# Altium PCB Wacky_Racer_PCB.PcbDoc (part 1 of 2)
Units mil, origin at the board's own origin, x right, y up, seen from the top; angles counter-clockwise.
Board outline 2519.68 x 3346.46 mil, 4 copper layers (Top Side, Ground Plane, Power Plane, Bottom Side), stack 33.234 mil thick; 87 components, 64 nets, 291 pads, 75 vias.
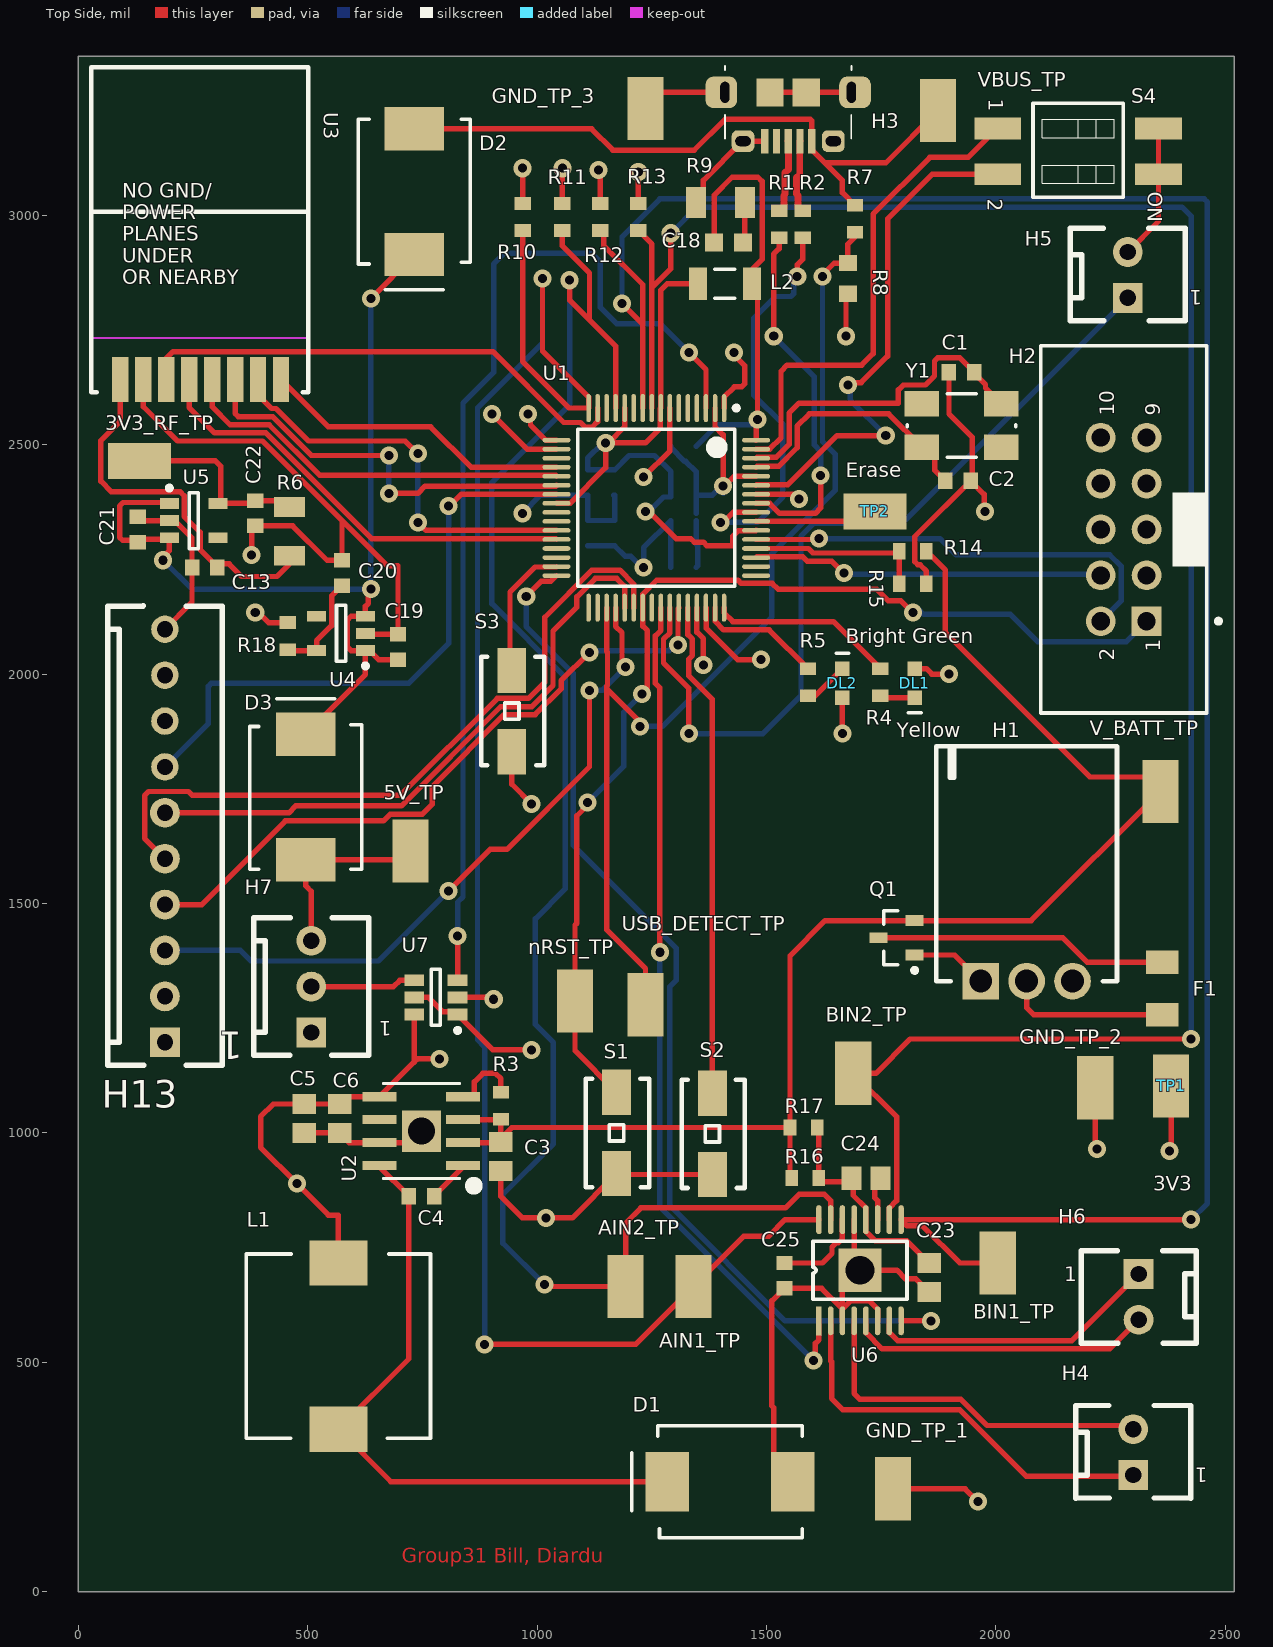
[diagram p0: Top Side view]
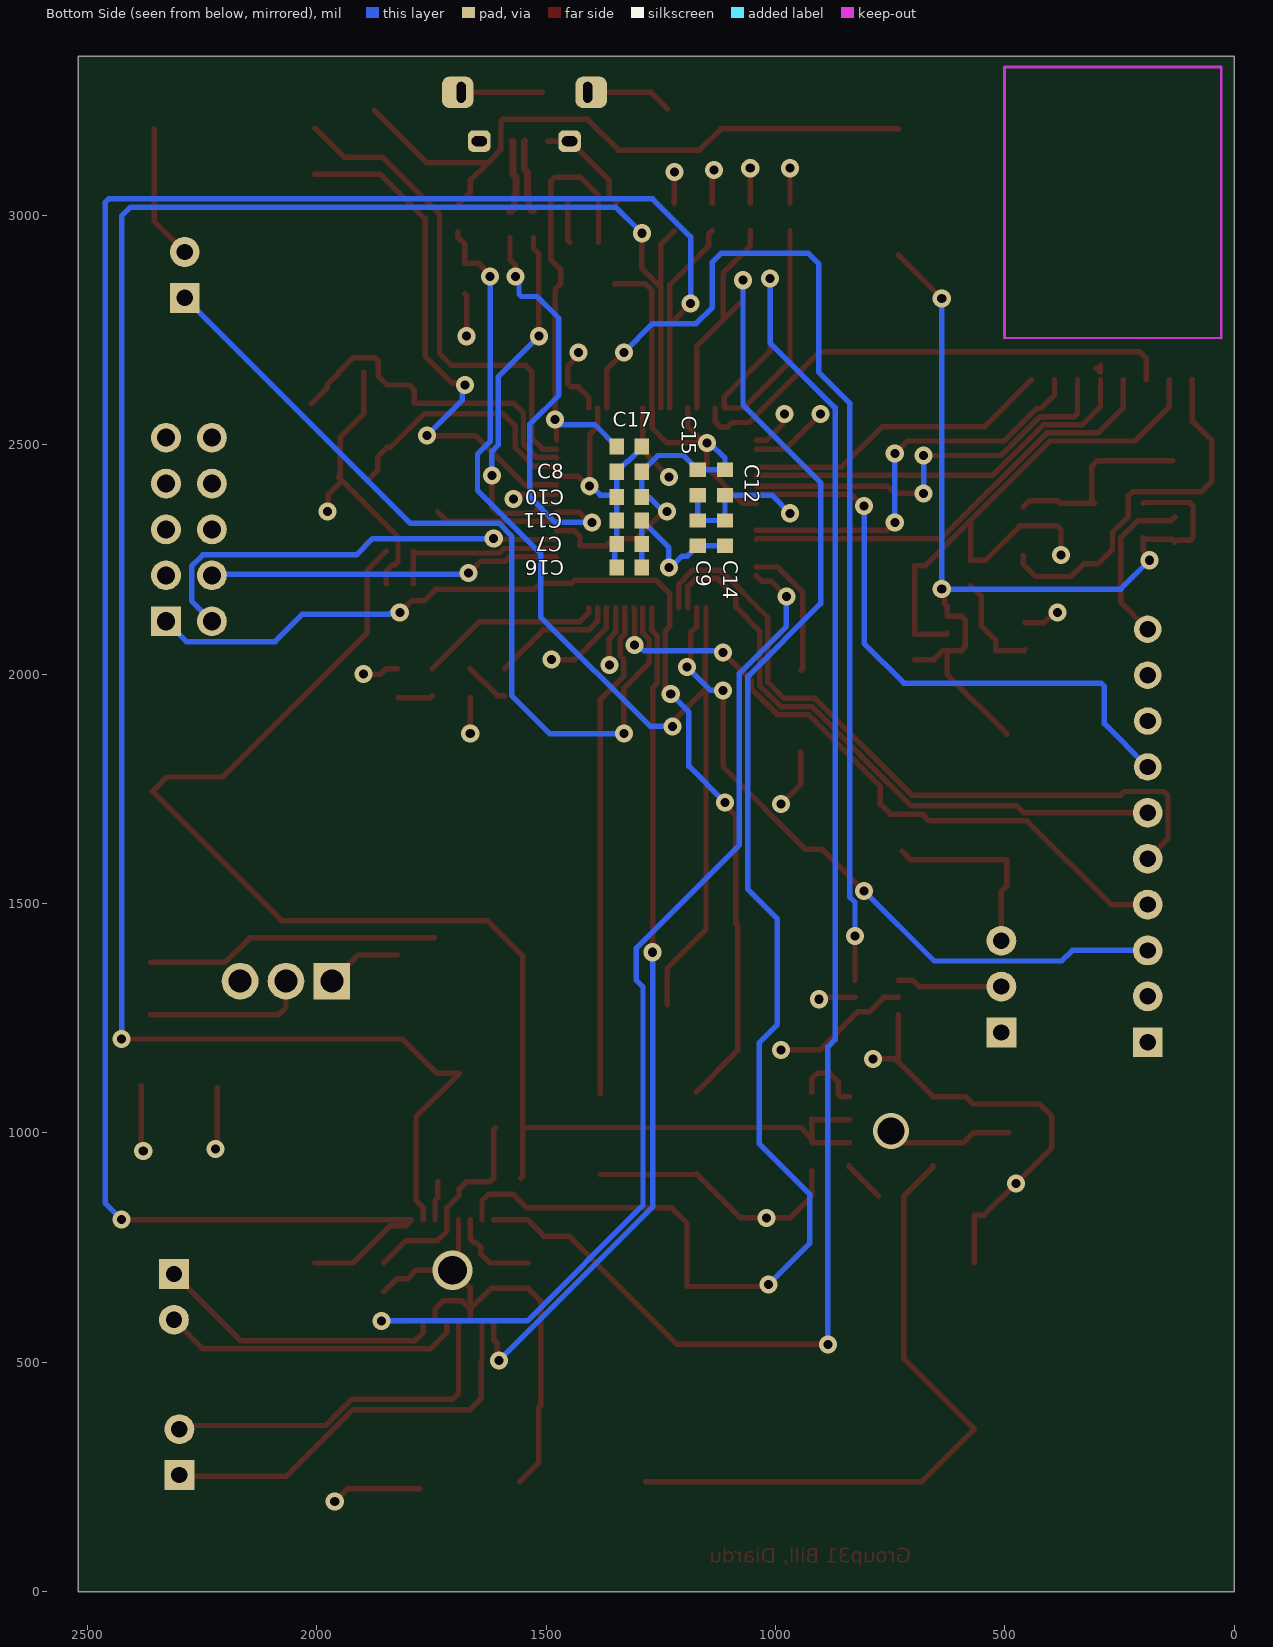
[diagram p1: Bottom Side view, seen from below]
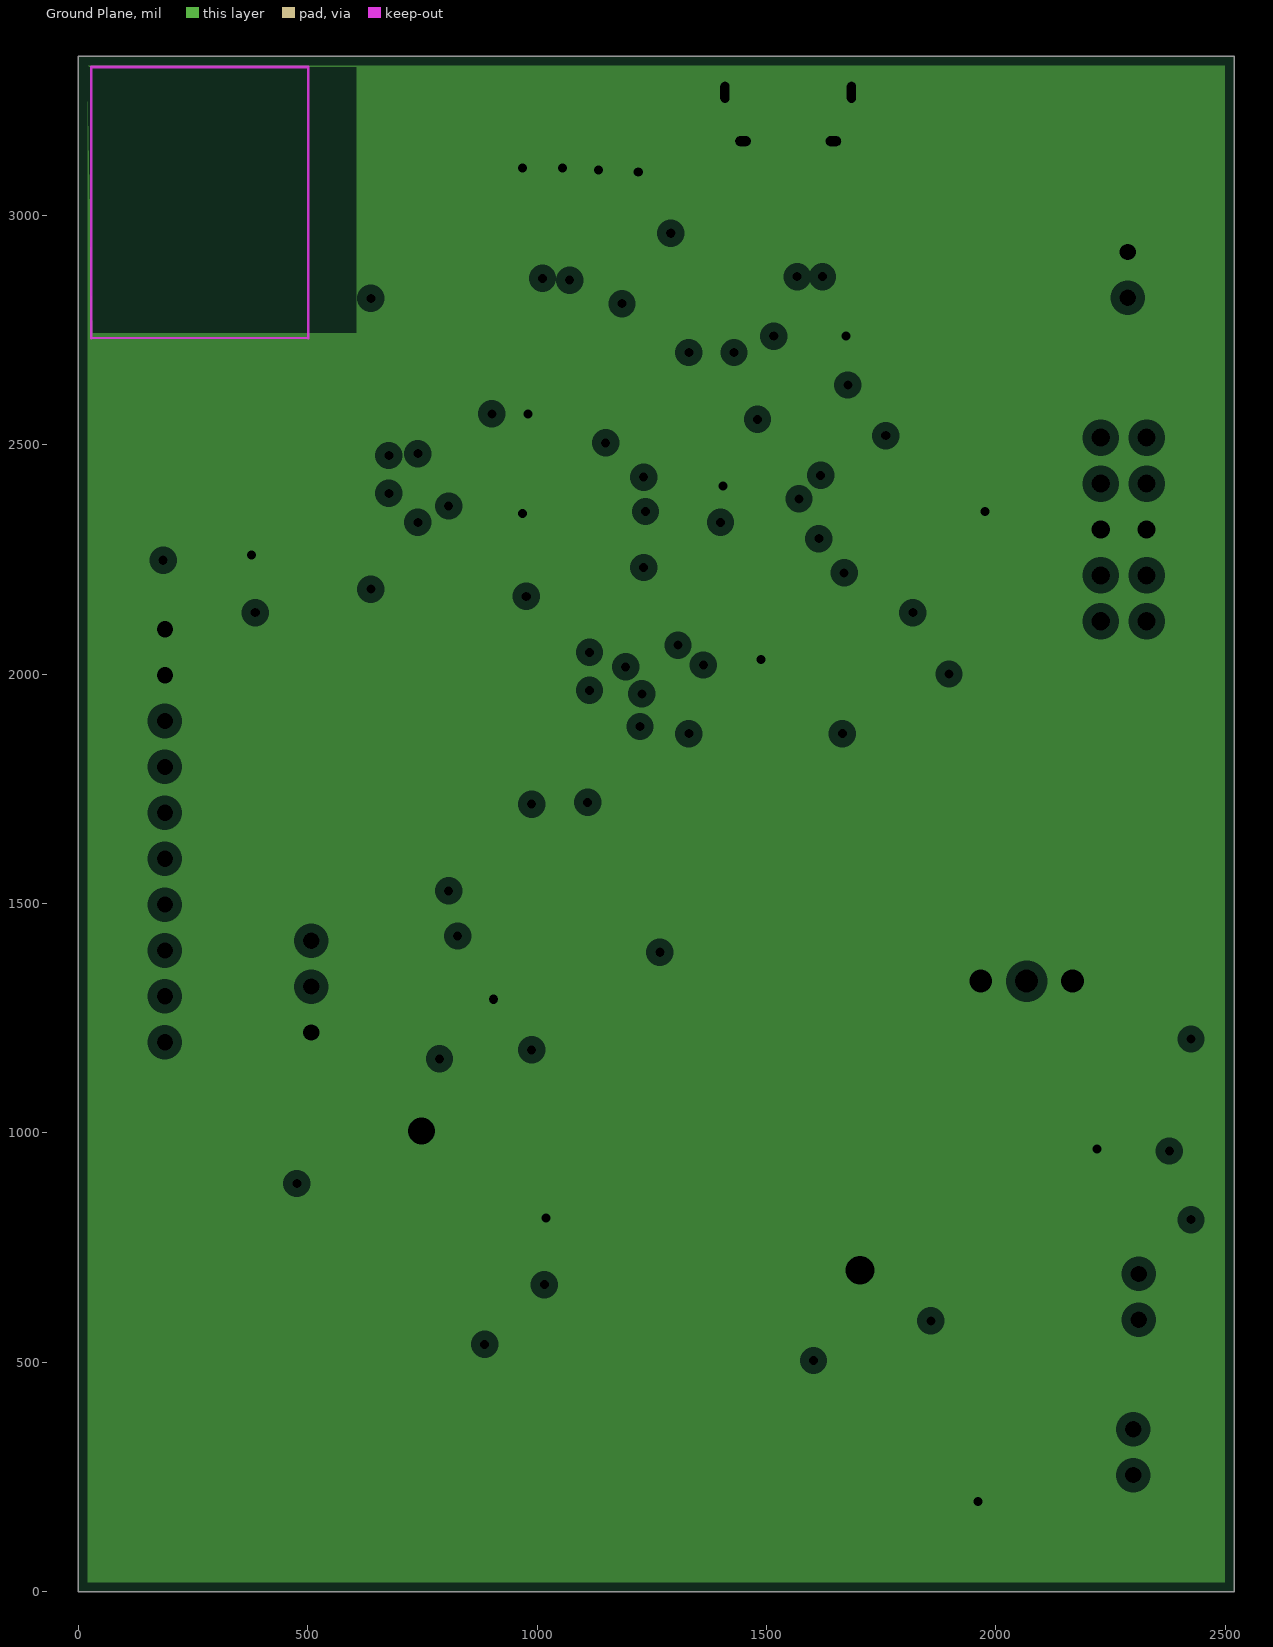
[diagram p2: Ground Plane, clearances drawn from the general rule]
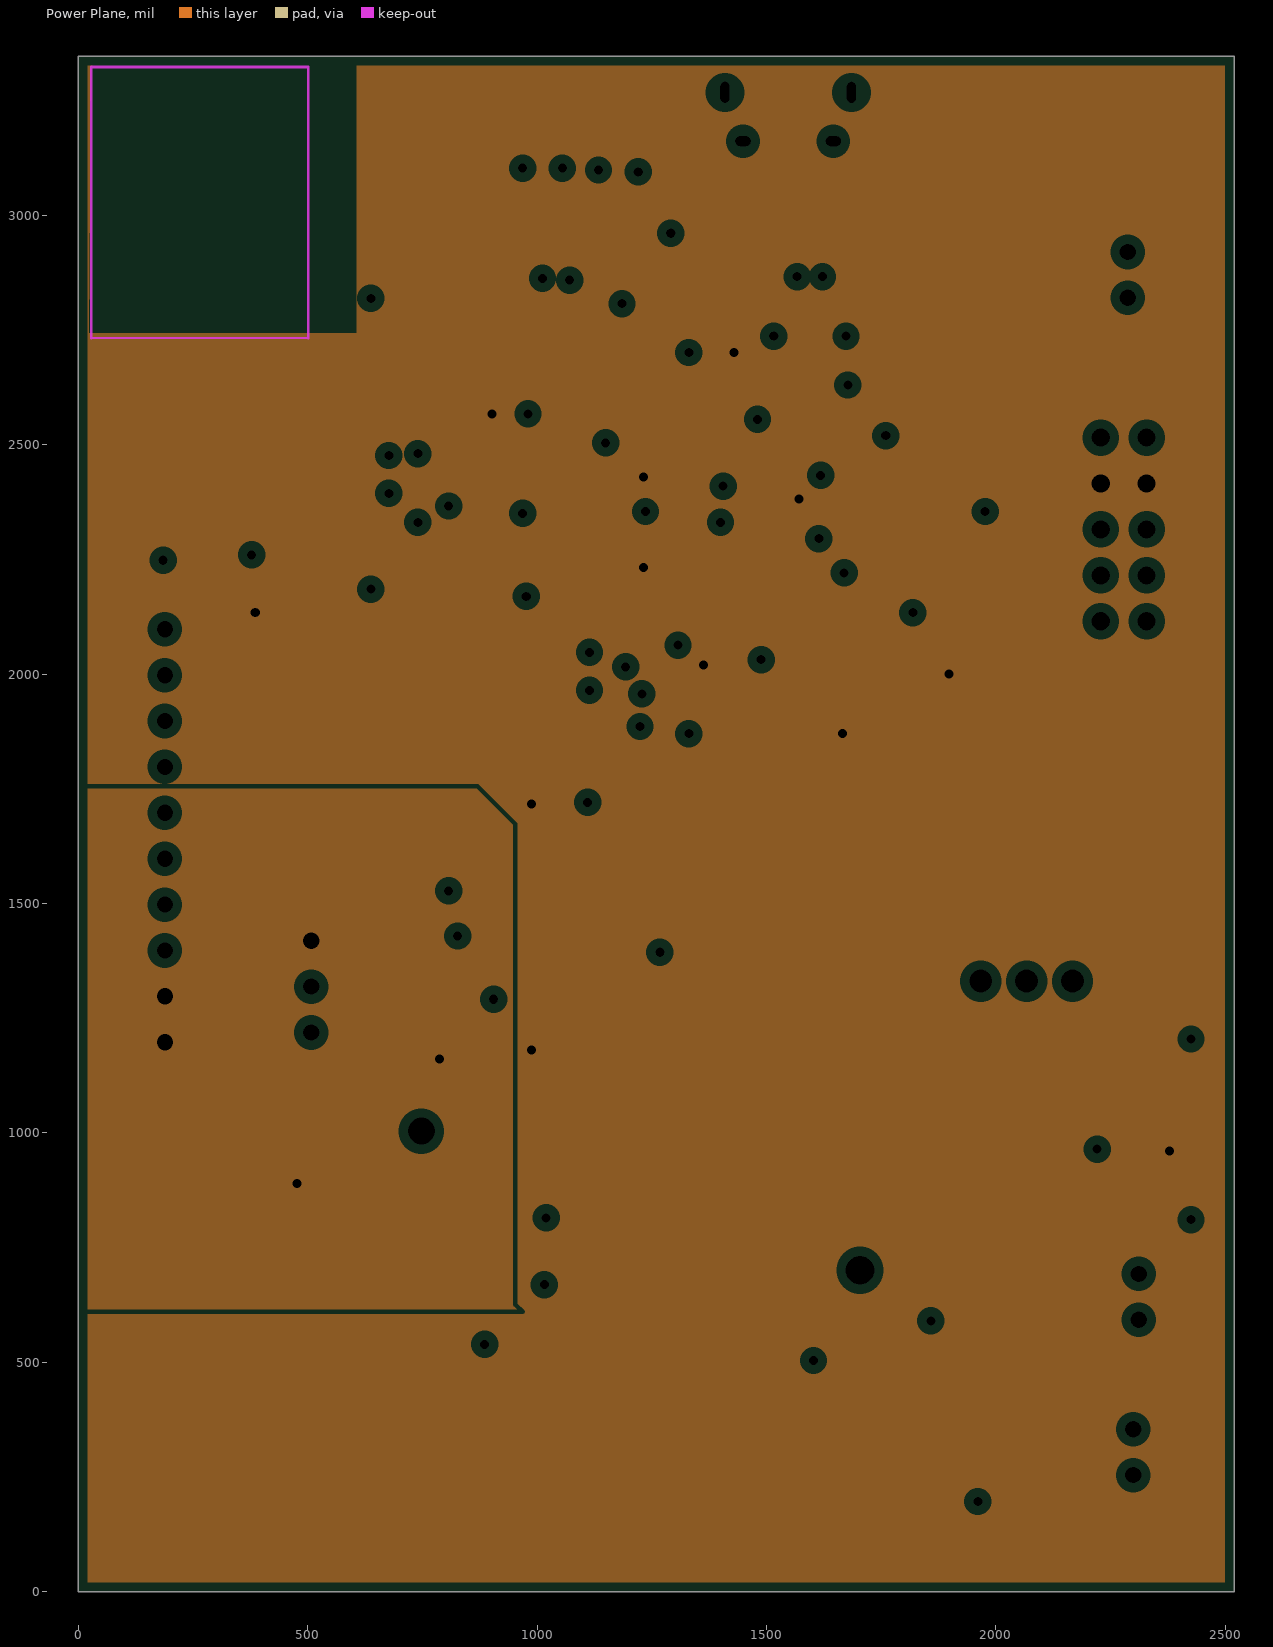
[diagram p3: Power Plane, clearances drawn from the general rule]

## Layer stack, top to bottom
Top Solder: solder mask 0.4, Solder Resist, Dk 3.5
Top Side: signal copper 1.4
Dielectric 1: core 12.6, FR-4, Dk 4.8
Ground Plane: plane copper 1.4169, net GND
Dielectric 3: prepreg 5, Dk 4.2
Power Plane: plane copper 1.4169, net (Multiple Nets)
Dielectric 4: core 10, Dk 4.2
Bottom Side: signal copper 1.4
Bottom Solder: solder mask 0.4, Solder Resist, Dk 3.5

## Board outline
0,3346.46 2519.68,3346.46 2519.68,0 0,0 0,3346.46

## Design rules (kind name [scope] priority, off if disabled: settings)
BoardOutlineClearance [All] p1: gap=19.68 ignorepadtopadclearanceinfootprint=FALSE
Clearance Min_Clearance_Circuit_Labs [All] p1: gap=5.91 ignorepadtopadclearanceinfootprint=FALSE except(0: Arc-Hole Track-Hole SMDPad-Hole THPad-Hole Via-Hole Fill-Hole Poly-Hole Region-Hole Text-Hole)
DiffPairsRouting [All] p1: maxlimit=10 minlimit=10 mostfreqgap=10 toplayer_minwidth=15 toplayer_maxwidth=15 toplayer_prefwidth=15 bottomlayer_minwidth=15 bottomlayer_maxwidth=15 bottomlayer_prefwidth=15 maxuncoupledlength=500
FanoutControl Fanout_BGA [IsBGA] p1 off: bgadir=Out bgaviamode=Centered fanoutstyle=Auto fanoutdirection=Alternating viagrid=1 // Fanout_BGA (Default Rule)
HoleSize [All] p1: absolutevalues=TRUE maxlimit=393.7 minlimit=11.81 maxpercent=80.000 minpercent=20.000
MinimumAnnularRing [All] p1: minimumring=3.94
MinimumSolderMaskSliver [All] p1: minsoldermaskwidth=3.94
NetAntennae [All] p1: netantennaetolerance=39.37
PasteMaskExpansion [All] p1 off: expansion=7.87
PlaneClearance [All] p1: clearance=20
PlaneConnect [All] p1: planeconnectstyle=Relief reliefexpansion=20 reliefentries=4 reliefconductorwidth=10 reliefairgap=10
PolygonConnect [All] p1: connectstyle=Relief reliefconductorwidth=10 reliefentries=4 polygonreliefangle="90 Angle" airgapwidth=10
RoutingVias [All] p1: holewidth=19.68 width=39.37 viastyle="Through Hole" minholewidth=11.81 minwidth=23.62 maxholewidth=39.37 maxwidth=78.74
SMDNeckDown [All] p1 off: percent=50.000
SMDToCorner [All] p1: distance=98425
SMDToPlane [All] p1: distance=1968504
SilkToSolderMaskClearance SilkscreenOverComponentPads [IsPad] p1: minsilkscreentomaskgap=10 clearancetoexposedcopper=TRUE
SolderMaskExpansion [All] p1: expansion=4
ViasUnderSMD [All] p1: allowed=FALSE
Width [All] p1: maxlimit=78.74 minlimit=5.91 preferedwidth=11.81
21 further rules are at their usual default settings.

## Classes and differential pairs
differential pair D: +D_P -D_N

## Components (designator, comment, footprint, x,y, rotation, side; value= is the part's Value field where it differs from the comment)
3V3_RF_TP "TP" TP_1206 133.86,2464.57 r180 top
5V_TP "TP" TP_1206 724.41,1614.17 r90 top
AIN1_TP "TP" TP_1206 1340.72,665.35 r270 top
AIN2_TP "TP" TP_1206 1192.91,665.35 r90 top
BIN1_TP "TP" TP_1206 2003.94,716.54 r90 top
BIN2_TP "TP" TP_1206 1688.98,1129.92 r90 top
C1 "27pF" CAPC1608L 1925.2,2657.48 r0 top
C2 "27pF" CAPC1608L 1917.32,2421.26 r180 top
C3 "10uF" CAPC2012L 921.26,948.82 r90 top
C4 "100nF" CAPC1608L 748.03,862.2 r180 top
C5 "33uF" CAPC2012L 492.13,1031.5 r90 top
C6 "33uF" CAPC2012L 569.56,1031.5 r90 top
C7 "100nF" CAPC1608L 1318.9,2283.46 r180 bottom
C8 "100nF" CAPC1608L 1318.9,2440.94 r0 bottom
C9 "100nF" CAPC1608L 1169.29,2307.09 r270 bottom
C10 "100nF" CAPC1608L 1318.9,2385.83 r0 bottom
C11 "100nF" CAPC1608L 1318.9,2334.65 r180 bottom
C12 "100nF" CAPC1608L 1110.24,2417.32 r270 bottom
C13 "10uF" CAPC1608L 275.59,2232.28 r0 top
C14 "100nF" CAPC1608L 1110.24,2307.09 r270 bottom
C15 "100nF" CAPC1608L 1169.29,2417.32 r270 bottom
C16 "100nF" CAPC1608L 1318.9,2232.28 r180 bottom
C17 "100nF" CAPC1608L 1318.9,2496.06 r0 bottom
C18 "4.7uF" CAPC1608N 1417.32,2940.94 r180 top
C19 "1uF" CAPC1608L 696.85,2059.06 r270 top
C20 "1uF" CAPC1608L 574.8,2220.47 r270 top
C21 "1uF" CAPC1608L 129.62,2314.79 r270 top
C22 "1uF" CAPC1608L 385.83,2350.39 r90 top
C23 "10uF" CAPC2012L 1854.33,685.04 r270 top
C24 "10uF" CAPC2012L 1716.54,901.57 r0 top
C25 "2.2uF" CAPC1608L 1539.37,688.98 r270 top
D1 "VS-30BQ015-M3/9AT" SMC 1420.28,240.16 r180 top
D2 "VS-30BQ015-M3/9AT" SMC 732.28,3051.18 r270 top
D3 "VS-30BQ015-M3/9AT" SMC 496.06,1732.28 r90 top
DL1 "Yellow" WL-SMCW0603 1822.83,1948.82 r90 top
DL2 "Bright Green" WL-SMCW0603 1665.35,2011.81 r270 top
F1 "5A" RESC3216N 2362.2,1314.96 r90 top
GND_TP_1 "TP" TP_1206 1775.59,224.41 r90 top
GND_TP_2 "TP" TP_1206 2216.54,1098.43 r90 top
GND_TP_3 "TP" TP_1206 1236.22,3232.28 r90 top
H1 "Battery_HEADER_3pin" BATT_HEADER_3POS 2066.93,1330.71 r0 top
H2 "Header 5X2 Vert" IDC2.54-V10D 2278.35,2315.13 r90 top
H3 "JS_USB_MICRO_B" FCI_USB_10118194-0001LF 1547.24,3324.8 r180 top
H4 "2 Pin Molex KK HDR" MOLEX_KK_2_HDR 2299.21,254.33 r90 top
H5 "2 Pin Molex KK HDR" MOLEX_KK_2_HDR 2287.4,2819.86 r90 top
H6 "2 Pin Molex KK HDR" MOLEX_KK_2_HDR 2311.02,692.78 r270 top
H7 "3 Pin Molex KK Hdr" MOLEX_KK_3_HDR 507.87,1218.9 r90 top
H13 "=Value" MOLEX_KK_10_HDR 188.98,1197.64 r90 top
L1 "IND 5.2UH 6A" INDUCTOR5u2 566.93,535.43 r90 top
L2 "1A max, Idc 0.3R," INDC3216L 1409.45,2850.39 r180 top
nRST_TP "TP" TP_1206 1082.68,1287.4 r90 top
Q1 "SSM3J328R,LF" SOT23_L 1783.46,1425.2 r180 top
R1 "27R" RESC1608L 1527.56,2980.32 r270 top
R2 "27R" RESC1608L 1578.74,2980.32 r270 top
R3 "100K" RESC1608L 921.26,1059.06 r270 top
R4 "3K3" RESC1608L 1748.03,1982.28 r90 top
R5 "3K3" RESC1608L 1590.55,1982.28 r90 top
R6 "1R" RESC3216L 460.63,2311.02 r270 top
R7 "27K" RESC1608L 1692.91,2992.13 r90 top
R8 "47K" RESC1608N 1677.17,2862.2 r90 top
R9 "1R" RESC3216L 1399.61,3027.56 r0 top
R10 "10K" RESC1608L 968.5,2996.06 r270 top
R11 "10K" RESC1608L 1055.12,2996.06 r270 top
R12 "10K" RESC1608L 1137.8,2996.06 r270 top
R13 "10K" RESC1608L 1220.47,2996.06 r270 top
R14 "10K" RESC1608L 1818.9,2267.72 r0 top
R15 "5K6" RESC1608L 1818.9,2196.85 r180 top
R16 "0R" RESC1608L 1584.65,901.57 r180 top
R17 "0R" RESC1608L 1580.71,1011.81 r180 top
R18 "0R" RESC1608L 456.69,2082.68 r90 top
S1 "EVQPNF05M" EVQPNF05M 1173.23,1000 r270 top
S2 "EVQPNF05M" EVQPNF05M 1381.89,998.03 r270 top
S3 "EVQPNF05M" EVQPNF05M 944.88,1919.29 r270 top
S4 "WS_SW DIP-2" DIP_SW_2WAY_SMD 2003.94,3188.98 r270 top
TP1 "3V3" TP_1206 2381.89,1102.36 r270 top value=TP
TP2 "Erase" TP_1206 1736.22,2354.33 r180 top value=TP
U1 "ATSAM4S8BA-ANR" LQFP64_L 1259.84,2362.2 r270 top locked
U2 "ADP2302ARDZ-5.0 BUCK" RD_8_1 748.03,1003.94 r180 top locked value=Value
U3 "nRF24 SMD" NRF24 28.68,2614.17 r0 top
U4 "CAT6219-330TDGT3" SOT95P280X145-5N 572.83,2088.58 r180 top
U5 "CAT6219-330TDGT3" SOT95P280X145-5N 251.66,2334.48 r0 top
U6 "DRV8833" HTSOP16 1614.17,590.55 r90 top locked
U7 "SN74LVC1T45" SOT23-6_N 779.53,1295.28 r180 top
USB_DETECT_TP "TP" TP_1206 1236.22,1279.53 r90 top
V_BATT_TP "TP" TP_1206 2358.27,1744.09 r90 top
VBUS_TP "TP" TP_1206 1874.02,3228.35 r90 top
Y1 "12MHz" 6.0X3.5-4 1925.2,2541.57 r180 top

## Footprints (in the part's own frame and the unit in brackets; to place one, negate y for a bottom-side part, rotate by r counter-clockwise, add the part's x,y. Pads: shape width x height; smd on the part's side, far side on the other; paste and mask are expansions set on the pad)
6.0X3.5-4 [mm] "4 SMD 6.0X3.5 mm No Lead Crystal"
  rect 1.9x1.4 smd: 1(-2.2,-1.2) 2(2.2,-1.2) 3(2.2,1.2) 4(-2.2,1.2)
  silkscreen extent -3,-1.75 3,1.75, body extent -3,-1.75 3,1.75, height 1.2
BATT_HEADER_3POS [mil]
  rect 80x80 hole 50: 1(-100,0)
  round 80 hole 50: 2(0,0) 3(100,0)
  silkscreen extent -197,0 197,512
CAPC1608L [mm] "Chip Capacitor, Body 1.6x0.8mm, IPC High Density"
  rect 0.8x0.9 smd: 1(-0.7,0) 2(0.7,0)
  body extent -0.87,-0.48 0.87,0.48, height 0.85
CAPC1608N [mm] "Chip Capacitor, Body 1.6x0.8mm, IPC Medium Density"
  rect 1x1 smd: 1(-0.8,0) 2(0.8,0)
  body extent -0.87,-0.48 0.87,0.48, height 0.85
CAPC2012L [mm] "Chip Capacitor, Body 2.0x1.3mm, IPC High Density"
  rect 1.1x1.3 smd: 1(-0.8,0) 2(0.8,0)
  body extent -1.1,-0.72 1.1,0.72, height 1.1
DIP_SW_2WAY_SMD [mm] "DIP Switch; 4 Leads"
  rect 1.2x2.6 smd: 1(0,0) 2(2.54,0) 3(2.54,8.9) 4(0,8.9)
  silkscreen extent -1.4,1.95 3.81,6.95
EVQPNF05M [mm] "Panansonic light touch SMD push button switch"
  rect 2.5x1.6 smd: 1(-2.25,0) 2(2.25,0)
  silkscreen extent -3,-1.7 3,1.8, body extent -3,-1.7 3,1.8, height 5
FCI_USB_10118194-0001LF [mm] "Micro USB B Type Receptacle"
  rect 0.4x1.35 smd mask+0.07: 1(-1.3,4.15) 2(-0.65,4.15) 3(0,4.15) 4(0.65,4.15) 5(1.3,4.15)
  rrect50% 1.75x1.75 hole 0.5 slot 1.15 at 90 deg copper offset -0.2,0 paste+0 mask+0.1: 6(-3.5,1.45)
  rrect50% 1.25x1.2 hole 0.55 slot 0.85 at 0 deg: 6(-2.5,4.15) 6(2.5,4.15)
  rect 1.5x1.55 smd: 6(-1,1.45) 6(1,1.45)
  rrect50% 1.75x1.75 hole 0.5 slot 1.15 at 90 deg copper offset 0.2,0 paste+0 mask+0.1: 6(3.5,1.45)
  silkscreen extent -3.5,0 3.5,4
HTSOP16 [mm]
  rect 1.6x0.3 smd: 1(0,0)
  oval 1.6x0.3 smd: 2(0,-0.65) 3(0,-1.3) 4(0,-1.95) 5(0,-2.6) 6(0,-3.25) 7(0,-3.9) 8(0,-4.55) 9(5.6,-4.55) 10(5.6,-3.9) 11(5.6,-3.25) 12(5.6,-2.6) 13(5.6,-1.95) 14(5.6,-1.3) 15(5.6,-0.65) 16(5.6,0)
  rect 2.4x2.4 smd paste-0.5: 17(2.8,-2.275)
  silkscreen extent 1.2,-4.88 4.4,0.33
IDC2.54-V10D [mm] "Connector; IDC, Low Profile Male Header, Thru-Hole; 10 Position; Vertical; Pitch 2.54 mm; Body 20.32 x 9.2 x 9.45 mm (LxWxH)"
  rect 1.65x1.65 hole 1: 1(-5.08,-1.27)
  round 1.65 hole 1: 2(-5.08,1.27) 3(-2.54,-1.27) 4(-2.54,1.27) 5(0,-1.27) 6(0,1.27) 7(2.54,-1.27) 8(2.54,1.27) 9(5.08,-1.27) 10(5.08,1.27)
  silkscreen extent -10.16,-5.38 10.16,4.6, body extent -10.16,-4.6 10.16,4.6, height 9.45
INDC3216L [mm] "Chip Inductor, Body 3.2x1.6mm, IPC High Density"
  rect 1x1.8 smd: 1(-1.5,0) 2(1.5,0)
  silkscreen extent -0.55,-0.8 0.55,0.8, body extent -1.75,-0.95 1.75,0.95, height 1.9
INDUCTOR5u2 [mm]
  rect 2.5x3.2 smd: 1(-4.6,0) 2(4.6,0)
  silkscreen extent -5.1,-5.1 5.1,5.1
LQFP64_L [mm] "Thin QFP, 64-Leads, Body 10x10mm, Pitch 0.5mm, IPC High Density"
  oval 1.55x0.25 smd mask+0.07: 1(-5.525,3.75) 2(-5.525,3.25) 3(-5.525,2.75) 4(-5.525,2.25) 5(-5.525,1.75) 6(-5.525,1.25) 7(-5.525,0.75) 8(-5.525,0.25) 9(-5.525,-0.25) 10(-5.525,-0.75) 11(-5.525,-1.25) 12(-5.525,-1.75) 13(-5.525,-2.25) 14(-5.525,-2.75) 15(-5.525,-3.25) 16(-5.525,-3.75) 33(5.525,-3.75) 34(5.525,-3.25) 35(5.525,-2.75) 36(5.525,-2.25) 37(5.525,-1.75) 38(5.525,-1.25) 39(5.525,-0.75) 40(5.525,-0.25) 41(5.525,0.25) 42(5.525,0.75) 43(5.525,1.25) 44(5.525,1.75) 45(5.525,2.25) 46(5.525,2.75) 47(5.525,3.25) 48(5.525,3.75)
  oval 0.25x1.55 smd mask+0.07: 17(-3.75,-5.525) 18(-3.25,-5.525) 19(-2.75,-5.525) 20(-2.25,-5.525) 21(-1.75,-5.525) 22(-1.25,-5.525) 23(-0.75,-5.525) 24(-0.25,-5.525) 25(0.25,-5.525) 26(0.75,-5.525) 27(1.25,-5.525) 28(1.75,-5.525) 29(2.25,-5.525) 30(2.75,-5.525) 31(3.25,-5.525) 32(3.75,-5.525) 49(3.75,5.525) 50(3.25,5.525) 51(2.75,5.525) 52(2.25,5.525) 53(1.75,5.525) 54(1.25,5.525) 55(0.75,5.525) 56(0.25,5.525) 57(-0.25,5.525) 58(-0.75,5.525) 59(-1.25,5.525) 60(-1.75,5.525) 61(-2.25,5.525) 62(-2.75,5.525) 63(-3.25,5.525) 64(-3.75,5.525)
  silkscreen extent -5.65,-4.35 4.35,4.55, body extent -5,-5 5,5, height 1.6
MOLEX_KK_2_HDR [mil] "MOLEX_KK_2_HDR"
  rect 65x65 hole 35.43: 1(0,0)
  round 65 hole 35.43: 2(100,0)
  silkscreen extent -50,-125 152,125, body extent -44,-121 146,119, height 630
MOLEX_KK_3_HDR [mil] "MOLEX_KK_3_HDR"
  rect 65x65 hole 35.43: 1(0,0)
  round 65 hole 35.43: 2(100,0) 3(200,0)
  silkscreen extent -50,-125 250,125, body extent -44,-120 244,119, height 630
MOLEX_KK_10_HDR [mil] "MOLEX_KK_10_HDR"
  rect 65x65 hole 35.43: 1(0,0)
  round 65 hole 35.43: 2(100,0) 3(200,0) 4(300,0) 5(400,0) 6(500,0)
  round 60 hole 35.43: 7(600,0) 8(700,0) 9(800,0) 10(900,0)
  silkscreen extent -50,-125 951,125, body extent -44,-120 944,120, height 630
NRF24 [mm]
  rect 0.9x2.5 smd: 1(1.6,0.7) 2(2.871,0.7) 3(4.143,0.7) 4(5.414,0.7) 5(6.686,0.7) 6(7.957,0.7) 7(9.229,0.7) 8(10.5,0.7)
  Keep-Out Layer lines w0.1: 0,3 12,3
  Keep-Out Layer lines w0.15: 0,3 0,18 12,18 12,3
  silkscreen extent 0,0 12,18
RD_8_1 [mil]
  rect 74x20 smd paste+0 mask+0: 1(-91,75) 2(-91,25) 3(-91,-25) 4(-91,-75) 5(91,-75) 6(91,-25) 7(91,25) 8(91,75)
  rect 84.65x90 smd paste-44.5 mask+0: EPAD(0,0)
  silkscreen extent -118,-104 84,123, body extent 0,0 10,10, height 10
RESC1608L [mm] "Chip Resistor, Body 1.6x0.8mm, IPC High Density"
  rect 0.7x0.9 smd: 1(-0.75,0) 2(0.75,0)
  body extent -0.85,-0.48 0.85,0.48, height 0.9
RESC1608N [mm] "Chip Resistor, Body 1.6x0.8mm, IPC Medium Density"
  rect 0.9x1 smd: 1(-0.85,0) 2(0.85,0)
  body extent -0.85,-0.48 0.85,0.48, height 0.6
RESC3216L [mm] "Chip Resistor, Body 3.1x1.6mm, IPC High Density"
  rect 1.1x1.7 smd: 1(-1.35,0) 2(1.35,0)
  body extent -1.68,-0.87 1.68,0.87, height 2.54
RESC3216N [mm] "Chip Resistor, Body 3.2x1.6mm, IPC Medium Density"
  rect 1.3x1.8 smd: 1(-1.45,0) 2(1.45,0)
  body extent -1.68,-0.87 1.68,0.87, height 0.71
SMC [mm] "DO-214-AB/SMC; 2 C-Bend Leads; Body 7.9 x 5.9 mm, inc. leads (LxW)"
  rect 2.4x3.3 smd: 1(-3.475,0) 2(3.475,0)
  silkscreen extent -4,-3.1 5.43,3.1
SOT23-6_N [mm]
  rect 1.1x0.65 smd: 1(-1.2,0.95) 2(-1.2,0) 3(-1.2,-0.95) 4(1.2,-0.95) 5(1.2,0) 6(1.2,0.95)
  silkscreen extent -1.33,-1.55 0.25,1.95, body extent -0.9,-1.55 0.9,1.55, height 1.45
SOT23_L [mm] "SOT23, 3-Leads, Body 2.9x1.3mm, Pitch 0.95mm, Lead Span 2.3mm, IPC High Density"
  rect 1x0.6 smd: 1(-1,0.95) 2(-1,-0.95) 3(1,0)
  silkscreen extent -1.13,-1.5 0.7,1.92, body extent -0.7,-1.5 0.7,1.5, height 1.1
SOT95P280X145-5N [mm] "SOT23, 5-Leads, Body 2.90x2.80mm, Pitch 0.95mm, IPC Medium Density"
  rect 1.05x0.6 smd: 1(-1.35,0.95) 2(-1.35,0) 3(-1.35,-0.95) 4(1.35,-0.95) 5(1.35,0.95)
  silkscreen extent -1.48,-1.55 0.25,1.92, body extent -0.87,-1.52 0.87,1.53, height 1.45
TP_1206 [mm] "Test Point Pad"
  rect 3.5x2 smd: 1(0,0)
  body extent -1.62,-0.85 1.63,0.8, height 2
WL-SMCW0603 [mm] "2.4 x 0.8 x 0.7mm LED"
  rect 0.8x0.8 smd: 1(0,0) 2(1.6,0)
  silkscreen extent -0.85,-0.35 -0.85,0.35

## Part data
3V3_RF_TP 5V_TP AIN1_TP AIN2_TP BIN1_TP BIN2_TP GND_TP_1 GND_TP_2 GND_TP_3 nRST_TP TP1 TP2 USB_DETECT_TP V_BATT_TP VBUS_TP: library part TP_1206, "Test-Point 3.3x1.6x2.1mm SMD", Manufacturer="Harwin Inc", Manufacturer Part Number=S1751-46R, Supplier Part Number 1=952-1478-2-ND, Mounting Type="Surface Mount", Storage Location=ProtoPlace, Supplier="ECE Dept", Supplier 1=Digi-Key, Supplier 2=Farnell, Supplier Part Number 2=1826282, Type="PC Test Point"
C1 C2: library part CC_27pF_0603, "CAP CER 27pF NPO/COG +-5% 50V 0603", Code_IPC="1608 [0603]", PackageReference=0603, Storage Location="PCB Assembly WS", Supplier="ECE Dept"
C3: library part CC_10uF_16V_0805, "CAP CER 10uF X5R 16V 0805", Manufacturer="Samsung Electro-Mechanics", Manufacturer Part Number=CL21A106KOQNNWE, Max Voltage=16V, Operating Temperature="-55°C ~ 85°C", Package / Case="0805 (2012 Metric)", Ratings=-, Supplier Part Number 1=1276-2894-1-ND, Temperature Coefficient=X5R, Tolerance=±10%, Applications="General Purpose", Category=Capacitors, Code_IPC=2012[0805], ComponentLink1Description=http://www.samsungsem.com/kr/support/product-search/mlcc/CL21A106KOQNNWE.jsp, ComponentLink1URL=http://www.samsungsem.com/kr/support/product-search/mlcc/CL21A106KOQNNWE.jsp, Features=-, Height - Seated (Max)=-, Lead Spacing=-, Lead Style=-, Mounting Type="Surface Mount, MLCC", Note="Footprint corresponds to dimensions for bulk cassette packaging. This case size has tightened tolerances.", Notification="Current market demand for these product types have resulted in fluctuating and extending lead times. Lead times may differ.", PackageReference=0805, Packaging="Cut Tape (CT)", Part Status=Active, Pricing 1="1=0.35, 10=0.25, 100=0.1178, 500=0.08254, 1000=0.06831 (NZD)", RoHS="RoHS Compliant", Size / Dimension="0.079\" L x 0.049\" W (2.00mm x 1.25mm)", Stock 1=20000, Supplier 1=Digi-Key, Thickness (Max)="0.055\" (1.40mm)", Voltage - Rated=16V
C4 C7 C8 C9 C10 C11 C12 C14 C15 C16 C17: library part CC_100nF_0603, "CAP CER 100nF X7R +-10% 50V 0603", Code_IPC="1608 [0603]", PackageReference=0603, Storage Location="PCB Assembly WS", Supplier="ECE Dept"
C5 C6: library part CC_33uF_6V3_0805, "CAP CER 33uF X5R 6V3 0805", Manufacturer="TDK Corporation", Manufacturer Part Number=C2012X5R0J336M125AC, Operating Temperature="-55°C ~ 85°C", Package / Case="0805 (2012 Metric)", Ratings=-, Supplier Part Number 1=445-5986-1-ND, Temperature Coefficient=X5R, Tolerance=±20%, Voltage - Rated=6.3V, Applications="General Purpose", Category=Capacitors, ComponentLink1Description=https://product.tdk.com/info/en/catalog/datasheets/mlcc_commercial_general_en.pdf, ComponentLink1URL=https://product.tdk.com/info/en/catalog/datasheets/mlcc_commercial_general_en.pdf, Failure Rate=-, Features="Low ESL", Height - Seated (Max)=-, Lead Spacing=-, Lead Style=-, Mounting Type="Surface Mount, MLCC", Notification="Current market demand for these product types have resulted in fluctuating and extending lead times. Lead times may differ.", Packaging="Cut Tape (CT)", Part Status=Active, Pricing 1="1=1.65, 10=1.262, 100=0.9023, 500=0.6985, 1000=0.60149 (NZD)", RoHS="RoHS Compliant", Size / Dimension="0.079\" L x 0.049\" W (2.00mm x 1.25mm)", Stock 1=20000, Supplier 1=Digi-Key, Thickness (Max)="0.057\" (1.45mm)"
C13: library part CC_10uF_0603, "CAP CER 10UF X5R +-20% 6V3 0603", Voltage - Rated=6.3V, Storage Location="PCB Assembly WS", Supplier="ECE Dept"
C18: library part CC_4.7uF_0603, "CAP CER 4.7uF X5R +-20%  10V 0603", Max Voltage=10V, Code_IPC=2012[0805], Note="Footprint corresponds to dimensions for bulk cassette packaging. This case size has tightened tolerances.", PackageReference=0805, Storage Location="PCB Assembly WS", Supplier="ECE Dept"
C19 C20 C21 C22: library part CC_1uF_0603, "CAP CER 1uF Y5V -20% +80% 16V 0603", Max Voltage=16V, Code_IPC="1608 [0603]", PackageReference=0603, Storage Location="PCB Assembly WS", Supplier="ECE Dept"
C23 C24: library part CC_10uF_16V_0805, "CAP CER 10uF X5R 16V 0805", Manufacturer="Samsung Electro-Mechanics", Manufacturer Part Number=CL21A106KOQNNWE, Operating Temperature="-55°C ~ 85°C", Package / Case="0805 (2012 Metric)", Ratings=-, Supplier Part Number 1=1276-2894-1-ND, Temperature Coefficient=X5R, Tolerance=±10%, Voltage - Rated=16V, Applications="General Purpose", Category=Capacitors, Code_IPC=2012[0805], ComponentLink1Description=http://www.samsungsem.com/kr/support/product-search/mlcc/CL21A106KOQNNWE.jsp, ComponentLink1URL=http://www.samsungsem.com/kr/support/product-search/mlcc/CL21A106KOQNNWE.jsp, Features=-, Height - Seated (Max)=-, Lead Spacing=-, Lead Style=-, Mounting Type="Surface Mount, MLCC", Note="Footprint corresponds to dimensions for bulk cassette packaging. This case size has tightened tolerances.", Notification="Current market demand for these product types have resulted in fluctuating and extending lead times. Lead times may differ.", PackageReference=0805, Packaging="Cut Tape (CT)", Part Status=Active, Pricing 1="1=0.35, 10=0.25, 100=0.1178, 500=0.08254, 1000=0.06831 (NZD)", RoHS="RoHS Compliant", Size / Dimension="0.079\" L x 0.049\" W (2.00mm x 1.25mm)", Stock 1=20000, Supplier 1=Digi-Key, Thickness (Max)="0.055\" (1.40mm)"
C25: library part CC_2.2uF_0603, "CAP CER 2.2uF X5R +-20% 10V 0603", Max Voltage=10V, Code_IPC="1608 [0603]", PackageReference=0603, Storage Location="PCB Assembly WS", Supplier="ECE Dept"
D1 D2 D3: library part DS_VS-30BQ015-M3, "DIODE, SCHOTTKY, 3A, 15V, DO-214AB / SMC", Average Rectified Current=3A, Forward Voltage=350mV, Manufacturer="Vishay Semiconductors", Max Forward Surge Current (Ifsm)=650A, Max Reverse Voltage (DC)=15V, Peak Reverse Current=4mA, Supplier Part Number=VS-30BQ015-M3/9AT-ND, Supplier Part Number 1=VS-30BQ015-M3/9ATGIDKR-ND, ComponentLink1Description=https://datasheet.ciiva.com/36181/vs-30bq015-m3-9at-36181258.pdf, ComponentLink1URL=https://datasheet.ciiva.com/36181/vs-30bq015-m3-9at-36181258.pdf, Manufacturer Part Number=VS-30BQ015-M3/9AT, Supplier=Digi-Key, Supplier 1=Digi-Key, Supplier 2=Element14, Supplier Part Number 2=2628288
DL1: library part DL_150060YS75000, "LED Yellow 120mcd 0603 SMD", Forward Current If=30, Forward Voltage=2, Manufacturer="WURTH ELEKTRONIK", Manufacturer Part Number=150060YS75000, Supplier Part Number 1=2322074, LED Colour=Yellow, LED Mounting=SMD, Lens Shape=Rectangular, Luminous Intensity=120, Storage Location="PCB Assembly WS", Supplier="ECE Dept", Supplier 1=Farnell, Viewing Angle=140°, Wavelength Typ=590
DL2: library part DL_150060VS75000, "LED Bright Green 40mcd 0603 SMD", Forward Current If=30, Forward Voltage=2, Manufacturer="WURTH ELEKTRONIK", Manufacturer Part Number=150060VS75000, Supplier Part Number 1=2322073, LED Colour="Bright Green", LED Mounting=SMD, Luminous Intensity=40, Storage Location="PCB Assembly WS", Supplier="ECE Dept", Supplier 1=Farnell, Viewing Angle=140°, Wavelength Typ=570
F1: library part FS_Fuse_5.0A, "Fuse 5.0A Fast Acting 1206 SMD", Case/Package=1206, Case Code (Metric)=3216, DC Cold Resistance=19mR, Manufacturer="Bel TRP", Manufacturer Part Number=C1F5, Max Operating Temperature=125°C, Min Operating Temperature=-55°C, Supplier Part Number 1=507-1886-1-ND, Voltage Rating=125V, Voltage Rating (DC)=63V, Approvals=CE,cURus, Case Code (Imperial)=1206, ComponentLink1Description=http://www.farnell.com/datasheets/2571625.pdf, ComponentLink1URL=http://www.farnell.com/datasheets/2571625.pdf, ComponentLink2Description=http://belfuse.com/pdfs/C1F.pdf, ComponentLink2URL=http://belfuse.com/pdfs/C1F.pdf, ComponentLink3Description=http://www.mouser.com/ds/2/643/C1F-594910.pdf, ComponentLink3URL=http://www.mouser.com/ds/2/643/C1F-594910.pdf, ComponentLink4Description=https://belfuse.com/resources/StewartConnector/C1F.pdf, ComponentLink4URL=https://belfuse.com/resources/StewartConnector/C1F.pdf, Contact Plating=Nickel,Tin, Current Rating=5A, Fuse Type="Board Mount (Cartridge Style Excluded)", Length=0.126inch, Mount="Surface Mount", Number of Pins=2, Packaging="Tape and Reel", Pricing 1="1=0.32, 5=0.312, 10=0.298, 50=0.2662, 100=0.2479, 250=0.22032, 500=0.1836, 1000=0.17442 (USD)", Stock 1=725, Supplier 1=Digi-Key, Supplier 2=Element14, Supplier Part Number 2=2848595, Voltage Rating (AC)=125V, Width=0.062inch
H1: "3Pin Header 2.54mm spacing"
H2: library part JA_HDR_IDC_5X2_VERT, "IDC Header, 2,54mm, 10-Pin, Vert", Supplier Part Number 1=1096985, Storage Location="ECE Dept Store", Supplier="ECE Dept", Supplier 1=Farnell
H3: library part JS_USB_MICRO_B_SMT, "CONN USB MICRO B RECPT SMT R/A", Manufacturer=FCI, Manufacturer Part Number=10118194-0001LF, Supplier Part Number 1=609-4618-1-ND, Features="Shielded, Solder Retention", Gender=Receptacle, Mounting Type="Surface Mount, Right Angle, Horizontal", Number of Contacts=5, Specifications="USB 2.0", Supplier 1=Digi-Key
H4 H5 H6: library part JA_MOLEX_KK_2POS, "CONN HEADER 2POS 2.54mm VERT_Thru Hole", Supplier Part Number 1=1462926, Storage Location="ECE Dept Store", Supplier="ECE Dept", Supplier 1=Farnell
H7: library part JA_MOLEX_KK_3POS, "CONN HEADER 3POS 2.54mm VERT_Thru Hole", Manufacturer=Molex, Manufacturer PN=22-23-2031, Supplier Part Number 1=9731156, Storage Location="ECE Dept Store", Supplier="ECE Dept", Supplier 1=Farnell
H13: library part JA_MOLEX_KK_10POS, "CONN HEADER 10POS 2.54mm VERT_ Thru Hole", Supplier Part Number 1=1756828, Storage Location="ECE Dept Store", Supplier="ECE Dept", Supplier 1=Farnell
L1: library part CDRH104RNP-5R2NC, "FIXED IND 5.2UH 6A 22 MOHM SMD", Current - Saturation=5.6A, DC Resistance (DCR)="22 mOhm Max", Frequency - Self Resonant=-, Manufacturer="Sumida America Components Inc.", Operating Temperature="-40°C ~ 100°C", Package / Case=Nonstandard, Supplier Part Number 1=308-2280-1-ND, Tolerance=±30%, Category="Inductors, Coils, Chokes", ComponentLink1Description=http://products.sumida.com/products/pdf/CDRH104R.pdf, ComponentLink1URL=http://products.sumida.com/products/pdf/CDRH104R.pdf, Height - Seated (Max)="0.157\" (4.00mm)", Manufacturer Part Number=CDRH104RNP-5R2NC, Material - Core=Ferrite, Mounting Type="Surface Mount", Packaging="Cut Tape (CT)", Part Status=Active, Pricing 1="1=2.9, 10=2.678, 100=1.8743, 500=1.5173 (NZD)", Q @ Freq=-, Ratings=-, RoHS="RoHS Compliant", Shielding=Shielded, Size / Dimension="0.402\" L x 0.394\" W (10.20mm x 10.00mm)", Stock 1=3849, Supplier 1=Digi-Key, Supplier Device Package=-, Type=-
L2: library part IN_Ferrite-Bead, "Ferrite Bead, Rdc 0.3R, Z100MHZ 600R, Imax 1A, SMD 1206", DC Current Rating=1, DC Resistance Max=0.08, Ferrite Case Style="1206 ^3216 Metric]", Frequency Range="50MHz to 1", Impedance Tolerance="± 25%", Manufacturer=FAIR-RITE, Manufacturer Part Number=2512066017Y1, Supplier Part Number 1=1612060, Ferrite Mounting=SMD, Impedance=600, Manufacturer PN=2512066017Y1, Storage Location="PCB Assembly WS", Supplier="ECE Dept", Supplier 1=Farnell
Q1: library part TM_SSM3J328R, "MOSFET P-CH 20V 6A SOT23-3", Case/Package=SOT-23-3, Continuous Drain Current (ID)=6A, Drain to Source Breakdown Voltage=-20V, Drain to Source Resistance=47.4mR, Drain to Source Voltage (Vdss)=20V, Gate to Source Voltage (Vgs)=8V, Input Capacitance=840pF, Input Capacitance (Ciss) @ Vds="840pF @ 10V", Manufacturer=Toshiba, Max Operating Temperature=150°C, Max Power Dissipation=1W, Min Operating Temperature=-55°C, Package / Case="SOT-23-3 Flat Leads", Package Quantity=3000, Power Dissipation=2W, Supplier Device Package=SOT-23F, Supplier Part Number=SSM3J328RLFDKR-ND, ComponentLink1Description=https://datasheet.ciiva.com/11158/ssm3j328r-datasheet-en-20140301-11158652.pdf, ComponentLink1URL=https://datasheet.ciiva.com/11158/ssm3j328r-datasheet-en-20140301-11158652.pdf, Current - Continuous Drain (Id) @ 25° C=6A, Element Configuration=Single, FET Feature="Logic Level Gate, 1.5V Drive", FET Type="MOSFET P-Channel, Metal Oxide", Gate Charge (Qg) @ Vgs="12.8nC @ 4.5V", Manufacturer Part Number=SSM3J328R,LF, Mount="Surface Mount", Number of Channels=1, Number of Elements=1, Number of Pins=3, Packaging="Tape and Reel", Power - Max=1W, Pricing="1=0.79, 10=0.658, 25=0.5772, 100=0.4939, 250=0.42836, 500=0.36284, 1000=0.27972 (NZD)", Radiation Hardening=No, Rds On Max=29.8mR, Storage Location="PCB Assembly WS", Supplier=Digi-Key, Supplier 1=Digi-Key, Supplier Part Number 1=SSM3J328RLFDKR-ND, Turn-Off Delay Time=107ns, Turn-On Delay Time=32ns, Vgs(th) (Max) @ Id="1V @ 1mA"
R1 R2: library part RS_27R, "RES 27 OHM 1/10W 5% 0603 SMD", Storage Location="PCB Assembly WS", Supplier="ECE Dept"
R3: library part RS_100K, "RES 100K OHM 1/10W 5% 0603 SMD", Storage Location="PCB Assembly WS", Supplier="ECE Dept"
R4 R5: library part RS_3K3, "RES 3.3K OHM 1/10W 5% 0603 SMD", Storage Location="PCB Assembly WS", Supplier="ECE Dept"
R6 R9: library part RT_1R, "RES 1R OHM 1/4W 5% 1206 SMD", Storage Location="PCB Assembly WS", Supplier="ECE Dept"
R7: library part RS_27K, "RES 27K OHM 1/10W 5% 0603 SMD", Storage Location="PCB Assembly WS", Supplier="ECE Dept"
R8: library part RS_47K, "RES 47.0K OHM 1/10W 5% 0603 SMD", Storage Location="PCB Assembly WS", Supplier="ECE Dept"
R10 R11 R12 R13 R14: library part RS_10K, "RES 10.0K OHM 1/10W 5% 0603 SMD", Storage Location="PCB Assembly WS", Supplier="ECE Dept"
R15: library part RS_5K6, "RES 5.6K OHM 1/10W 5% 0603 SMD", Storage Location="PCB Assembly WS", Supplier="ECE Dept"
R16 R17 R18: library part RS_0R0, "RES 0.0 OHM 1/10W 5% 0603 SMD", Storage Location="PCB Assembly WS", Supplier="ECE Dept"
S1 S2 S3: library part WS_EVQPNF05M, "Panasonic 6 x 3.5mm SMD Light Touch Switch Type SMD", Manufacturer=Panasonic, Supplier Part Number 1=2079481, Manufacturer PN=EVQPNF05M, PackageDescription="6.0 x 3.5 mm", Storage Location="PCB Assembly WS", Supplier="ECE Dept", Supplier 1=Farnell, Supplier 2=Digi-Key, Supplier Part Number 2=P13598SCT-ND
S4: "DIP Switch, 2 Position, SPST SMD", Contact Current DC Max=25, Manufacturer="OMRON ELECTRONIC COMPONENTS", Manufacturer Part Number=A6SN-2101, Supplier Part Number 1=2029424, Contact Configuration=SPST, External Length / Height=7, No. of Switch Positions=2, PackageReference=DIP-4, Pitch Spacing=2.54, Storage Location="PCB Assembly WS", Supplier="ECE Dept", Supplier 1=Farnell
U1: library part SE_ATSAM4S16BA-MU, "IC MCU 32BIT 512KB FLASH 64LQFP", Manufacturer=Atmel, Package / Case=64-LQFP, Supplier Part Number 1=ATSAM4S8BA-ANRCT-ND, Voltage - Supply (Vcc/Vdd)="1.62 V ~ 3.6 V", Code_JEDEC=MO-220VMMD-3, ComponentLink1Description="Manufacturer URL", ComponentLink1URL=http://www.atmel.com/, ComponentLink2Description="SAM4S Series Datasheet", ComponentLink2URL=http://www.atmel.com/dyn/resources/prod_documents/11100.pdf, ComponentLink3Description="SAM4S Series Summary", ComponentLink3URL=http://www.atmel.com/dyn/resources/prod_documents/11100S.pdf, Connectivity="I²C, IrDA, Memory Card, SPI, SSC, UART/USART, USB", Core Processor="ARM® Cortex®-M4", Core Size=32-Bit, Data Converters="A/D 11x12b, D/A 2x12b", Manufacturer Part Number=ATSAM4S8BA-ANR, Number of I/O=47, PackageDescription="64-Pin Quad Flat No-Lead (QFN) Sawn, 9 x 9 x 1.0 mm Body, 0.5 mm Pitch, Exposed Pad", PackageReference=64PS, PackageVersion="revJ, Jul-2007", Packaging="Cut Tape (CT)", Peripherals="Brown-out Detect/Reset, DMA, POR, PWM, WDT", Program Memory Size="512KB (512K x 8)", Program Memory Type=FLASH, RAM Size="128K x 8", Speed=120MHz, Supplier 1=Digi-Key
U2: library part ADP2302ARDZ-5.0-R7, "IC REG BUCK 5V 2A 8SOIC", Current - Output=2A, Frequency - Switching=700kHz, Supplier Part Number 1=ADP2302ARDZ-5.0-R7CT-ND, Voltage - Input (Max)=20V, Voltage - Output (Min/Fixed)=5V, Manufacturer_Part_Number=ADP2302ARDZ-5.0-R7, Output Type=Fixed, Supplier 1=Digi-Key, Type=DEV, Vendor="Analog Devices Inc"
U3: library part NRF24, "nRF24 SMD Module", Warning="No power planes near or under device"
U4 U5: library part SV_CAT6219-330TDGT3, "IC REG LIN 3.3V 500MA TSOT23-5", Base Part Number=CAT6219, Current - Output=500mA, Package / Case="SOT-23-5 Thin, TSOT-23-5", Supplier Device Package=TSOT-23-5, Supplier Part Number=CAT6219-330TDGT3CT-ND, Voltage - Input (Max)=5.5V, Voltage - Output (Min/Fixed)=3.3V, Voltage Dropout (Max)="0.5V @ 500mA", ComponentLink1Description=http://www.onsemi.com/pub/Collateral/CAT6219-D.PDF, ComponentLink1URL=http://www.onsemi.com/pub/Collateral/CAT6219-D.PDF, Manufacturer Part Number=CAT6219-330TDGT3, Supplier=Digi-Key, Supplier 1=Digi-Key
U6: "Dual H-Bridge Motor Driver 1.5A"
U7: "1.8V - 5V level converter"
Y1: library part XT_CRYSTAL_12MHz_18pF, "CRYSTAL 12MHZ 18PF 6X3.5mm SMD", ESR (Equivalent Series Resistance)="60 Ohm", Frequency Stability=±50ppm, Frequency Tolerance=±30ppm, Load Capacitance=18pF, Manufacturer="CTS-Frequency Controls", Manufacturer Part Number=406C35D12M00000, Operating Mode=Fundamental, Operating Temperature="-20°C ~ 70°C", Package / Case="4-SMD, No Lead (DFN, LCC)", Supplier Part Number 1=CTX855CT-ND, Frequency=12MHz, Height="0.047\" (1.20mm)", Mounting Type="Surface Mount", Size / Dimension="0.236\" L x 0.138\" W (6.00mm x 3.50mm)", Supplier 1=Digi-Key

## Via types
v1: diameter 39.37, hole 19.68, Top Side to Bottom Side, 73 vias
v2: diameter 86.61, hole 62.99, Top Side to Bottom Side, 1 vias
v3: diameter 78.74, hole 59.06, Top Side to Bottom Side, 1 vias

## Nets (pads, with @x,y where several pads share a name; then routed paths per layer and width w, separated by ;. In a path a pad name is that pad's centre, name@x,y a point inside that pad or via, vN(x,y) a via of type N, cw(c..) or ccw(c..) an arc to the next point about the centre after c; other vN are vias at no path point)
3V3: C7.2 C9.2 C11.2 C14.2 C16.2 DL1.2 DL2.2 H2.7 H2.8 R18.2 S3.2 TP1.1 U1.1 U1.7 U1.18 U1.45 U1.58 U7.1 U7.5 | length 1921.6
  Top Side w11.81: v1(385.83,2133.86) 393.28,2133.86 414.94,2112.2 R18.2 ; U7.5 763.78,1295.28 795.28,1263.78 820.87,1263.78 U7.1 903.54,1181.1 v1(988.19,1181.1) ; v1(901.57,2566.93) 978.35,2490.16 U1.18 ; S3.2 944.88,1759.84 v1(988.19,1716.54) ; v1(1232.28,2429.13) 1289.37,2486.22 U1.7 ; U1.45 1348.43,2091.25 1362.2,2077.47 v1(1362.2,2019.68) ; U1.1 1407.48,2603.35 1430.12,2625.98 1445.84,2625.98 1452.76,2632.9 1452.76,2671.52 1429.13,2695.14 v1(1429.13,2700.79) ; U1.58 1557.09,2391.73 1566.93,2381.89 v1(1570.87,2381.89) ; v1(1665.35,1870.08) DL2.2 ; DL1.2 1848.43,2011.81 1860.24,2000 v1(1897.64,2000) ; v1(2377.95,960.63) 2381.89,964.57 TP1.1
  Bottom Side w11.81: C14.2 C9.2 1192,2256.82 1203.93,2256.82 1228.46,2232.28 v1(1232.28,2232.28) 1232.28,2275.59 C11.2 C7.2 C16.2
3V3_REG_IN: C19.2 C21.2 D2.2 D3.2 U4.1 U4.3 U5.1 U5.3 | length 2122.2
  Top Side w11.81: v1(185.04,2248.03) 185.04,2255.49 198.51,2268.96 U5.3 195.56,2294.12 136.51,2294.12 C21.2 125.68,2291.17 97.16,2291.17 90.25,2298.09 90.25,2365.97 98.12,2373.85 196.55,2373.85 U5.1 ; D3.2 625.98,1999.02 U4.1 ; v1(637.8,2185.04) 632.52,2179.77 632.52,2154.18 625.98,2147.64 U4.3 594.49,2125.98 586.61,2118.11 586.61,2059.06 594.49,2051.18 U4.1 ; v1(637.8,2818.9) 732.28,2913.39 D2.2 ; C19.2 654.53,2031.5 634.84,2051.18 U4.1
  Bottom Side w11.81: v1(185.04,2248.03) 248.03,2185.04 v1(637.8,2185.04) v1(637.8,2818.9)
3V3_RF: 3V3_RF_TP.1 C22.2 R6.1 U5.5 | length 429.4
  Top Side w11.81: 3V3_RF_TP.1 299.21,2464.57 311.02,2452.76 311.02,2377.79 U5.5@305.12,2371.88 ; U5.5 U5.5@305.12,2371.88 ; R6.1 446.85,2377.95 C22.2 379.75,2371.88 U5.5@305.12,2371.88
5V: 5V_TP.1 C5.2 C6.2 D3.1 H7.3 H13.1 H13.2 L1.2 U2.5 U7.6 | length 1364.9
  Top Side w11.81: H7.3 507.87,1526.57 496.06,1538.39 D3.1 705.71,1595.47 5V_TP.1 ; L1.2 566.93,820.87 545.28,820.87 v1(476.38,889.76) 397.64,968.5 397.64,1035.43 425.2,1062.99 C5.2 C6.2 585.31,1078.74 609.99,1078.74 610.19,1078.94 U2.5 732.28,1154.19 ; U7.6 732.28,1154.19 ; v1(787.4,1161.42) 739.51,1161.42 732.28,1154.19
AIN1: AIN1_TP.1 R10.2 U1.16 U6.16 | length 4024.1
  Top Side w11.81: v1(885.83,539.37) 1214.73,539.37 AIN1_TP.1 1450.5,775.13 1504.91,775.13 1540.8,811.02 U6.16 ; R10.2 968.5,2681.1 1069.88,2579.72 U1.16 1112.2,2603.35 1011.81,2703.74 v1(1011.81,2862.2)
  Bottom Side w11.81: v1(885.83,539.37) 885.83,1187.74 870.08,1203.49 870.08,2579.98 1011.81,2721.71 v1(1011.81,2862.2)
AIN2: AIN2_TP.1 R11.2 U1.13 U6.15 | length 3827.6
  Top Side w11.81: v1(1015.75,669.29) 1019.68,665.35 AIN2_TP.1 1192.91,803.15 1226.38,836.61 1541.34,836.61 1570.87,866.14 1625.98,866.14 1639.76,852.36 U6.15 ; R11.2 1055.12,2933.07 1114.17,2874.02 1114.17,2771.65 ; v1(1070.87,2858.27) 1070.87,2814.96 1114.17,2771.65 ; U1.13 1171.26,2714.57 1114.17,2771.65
  Bottom Side w11.81: v1(1015.75,669.29) 925.2,759.84 925.2,866.14 1035.43,976.38 1035.43,1196.85 996.06,1236.22 996.06,1466.54 1061.02,1531.5 1061.02,1994.09 901.57,2153.54 901.57,2417.32 1070.87,2586.61 v1(1070.87,2858.27)
BATT_DETECT: R14.1 R15.2 U1.52 | length 388.6
  Top Side w11.81: U1.52 1591.28,2273.62 1601.13,2263.78 1785.43,2263.78 R14.1 R15.2
BIN1: BIN1_TP.1 R12.2 U1.10 U6.9 | length 5061.4
  Top Side w11.81: R12.2 1145.67,2958.66 1145.67,2933.07 1230.32,2848.43 1230.32,2761.81 ; v1(1185.04,2807.09) 1230.32,2761.81 ; U1.10 1230.32,2761.81 ; BIN1_TP.1 1921.26,716.54 1840.12,797.67 1806.66,797.67 U6.9 v1(2425.2,811.02)
  Bottom Side w11.81: v1(1185.04,2807.09) 1185.04,2952.76 1267.72,3035.43 2453.71,3035.43 2460.63,3028.51 2460.63,846.46 v1(2425.2,811.02)
BIN2: BIN2_TP.1 R13.2 U1.9 U6.10 | length 4625.5
  Top Side w11.81: R13.2 1250,2937.01 1250,2841.98 ; U1.9 1250,2841.98 ; v1(1291.34,2960.63) 1291.34,2883.32 1250,2841.98 ; U6.10 1767.72,836.61 1783.46,852.36 1783.46,1035.43 BIN2_TP.1 1738.19,1129.92 1812.99,1204.72 v1(2425.2,1204.72)
  Bottom Side w11.81: v1(1291.34,2960.63) 1348.43,3017.72 2405.51,3017.72 2425.2,2998.03 v1(2425.2,1204.72)
BUMPER_ACTIVATE: H5.1 U1.42 | length 1856.9
  Top Side w11.81: U1.42 1289.37,2089.82 1275.59,2076.04 1275.59,2024.03 1330.71,1968.91 v1(1330.71,1870.08)
  Bottom Side w11.81: v1(1330.71,1870.08) 1492.13,1870.08 1575.17,1953.12 1575.17,2300.81 1603.09,2328.74 1796.28,2328.74 H5.1
BUTTON: S2.1 U1.44 | length 1086.6
  Top Side w11.81: U1.44 1328.74,2085.88 1338.58,2076.04 1338.58,2040.61 1330.71,2032.73 1330.71,1996.06 1381.89,1944.88 S2.1
Channel1: S4.1 U1.63 | length 1079.1
  Top Side w11.81: U1.63 1506.93,2490.16 1531.5,2514.72 1531.5,2659.86 1544.87,2673.23 1707.14,2673.23 1732.28,2698.37 1732.28,3002.38 1855.89,3125.98 1939.42,3125.98 2002.42,3188.98 S4.1
Channel2: S4.2 U1.59 | length 1164
  Top Side w11.81: U1.59 1478.35,2412.4 1546.26,2412.4 1653.54,2519.68 v1(1759.84,2519.68) ; v1(1677.17,2629.92) 1682.44,2635.19 1706.06,2635.19 1763.78,2692.91 1763.78,2992.13 1860.63,3088.98 S4.2
  Bottom Side w11.81: v1(1677.17,2629.92) 1682.44,2624.65 1682.44,2597.09 v1(1759.84,2519.68)
D_N: H3.2 R2.1 | length 172.6
  Top Side w15: R2.1@1572.46,3016.12 R2.1 ; H3.2 1572.54,3161.12 1572.54,3089.19 1565.65,3082.3 1565.65,3046.18 1568.52,3043.31 1568.52,3016.12 1575.85,3008.8 R2.1@1579.78,3008.8
D_P: H3.3 R1.1 | length 162.3
  Top Side w15: R1.1 1531.5,3009.84 1537.78,3016.12 1537.78,3043.31 1540.65,3046.18 1540.65,3092.65 1547.54,3099.54 1547.54,3161.12 H3.3
GND: C1.1 C2.1 C3.1 C5.1 C6.1 C7.1 C8.2 C9.1 C10.2 C11.1 C12.2 C13.1 C14.1 C15.2 C16.1 C17.1 C19.1 C20.1 C21.1 C22.1 C23.2 C25.2 D1.1 GND_TP_1.1 GND_TP_2.1 GND_TP_3.1 H1.1 H1.3 H2.5 H2.6 H3.5 H3.6 H5.2 H7.1 H13.9 H13.10 Q1.1 R8.1 R9.1 R10.1 R11.1 R12.1 R13.1 R15.1 S1.2 S2.2 S4.3 S4.4 U1.2 U1.17 U1.46 U1.60 U2.7 U2.EPAD U3.2 U4.2 U5.2 U6.3 U6.6 U6.13 U6.17 U7.2 | length 7422.6
  Top Side w11.81: C21.1 137.49,2334.48 U5.2 210.3,2334.48 248.03,2296.74 C13.1 248.03,2156.69 H13.10 ; U3.2 141.73,2582.68 216.54,2507.87 401.57,2507.87 574.8,2334.65 ; v1(377.95,2259.84) 377.95,2314.96 C22.1 467.49,2322.83 542.29,2248.03 C20.1 574.8,2334.65 ; C5.1 C6.1 590.62,978.94 U2.7 723.03,978.94 v3(748.03,1003.94) ; U4.2 627.95,2086.61 C19.1 696.85,2236.22 673.23,2236.22 574.8,2334.65 ; U7.2 901.57,1295.28 v1(905.51,1291.34) ; C3.1 921.26,861.73 968.03,814.96 v1(1019.68,814.96) 1076.77,814.96 S1.2 1175.2,909.45 S2.2 ; R10.1 v1(968.5,3102.36) ; v1(980.32,2566.93) 985.59,2561.66 985.59,2542.96 1018.7,2509.84 U1.17 ; R11.1 v1(1055.12,3102.36) ; v1(1133.86,3098.43) 1137.8,3094.49 R12.1 ; R13.1 v1(1220.47,3094.49) ; GND_TP_3.1 1271.65,3267.72 H3.6@1409.45,3267.72 ; R9.1 1362.2,3043.31 1362.2,3075.79 1447.83,3161.42 1448.82,3161.42 H3.5 ; U1.46 1369.09,2143.7 1369.09,2099.41 1437.01,2031.5 v1(1488.19,2031.5) ; U1.2 1387.8,2538.96 1405.3,2521.46 v1(1405.3,2409.45) 1409.03,2409.45 1430.69,2431.1 U1.60 ; H3.6@1507.87,3267.72 1586.61,3267.72 H3.6@1685.04,3267.72 ; D1.1 1515.75,281.5 1515.75,401.58 1511.81,405.51 1511.81,633.86 C25.2 1620.08,661.42 U6.3@1665.35,616.14 ; U6.3 U6.3@1665.35,616.14 ; v1(1673.23,2736.22) 1673.23,2824.8 R8.1 ; U6.13 1690.95,713.58 v2(1703.74,700.79) ; U6.6 1742.13,616.14 1724.41,633.86 1683.07,633.86 U6.3@1665.35,616.14 ; GND_TP_1.1 1933.07,224.41 v1(1960.63,196.85) ; Q1.1 1909.84,1387.8 H1.1 ; R15.1 1848.43,2224.41 1834.65,2238.19 1829.75,2238.19 1822.83,2245.11 1822.83,2299.21 1952.76,2429.13 1948.82,2433.07 1948.82,2515.75 1897.64,2566.93 C1.1 ; C23.2 1825.72,682.16 1802.59,682.16 1783.96,700.79 v2(1703.74,700.79) ; C2.1 1974.41,2391.73 1974.41,2356.3 v1(1976.38,2354.33) ; GND_TP_2.1 2216.54,968.5 v1(2220.47,964.57) ; H5.2 2354.33,2986.79 S4.3 S4.4 ; U6.3@1665.35,616.14 1665.35,662.4 v2(1703.74,700.79)
  Bottom Side w11.81: v1@976.38,2350.39 v1(968.5,2350.39) 1007.87,2389.76 C12.2 C14.1 C9.1 1169.29,2387.8 1167.32,2389.76 C15.2 ; C17.1 1291.34,2494.09 1321.78,2463.65 1323.75,2463.65 C8.2 C10.2 ; C16.1 1350.39,2236.22 1350.39,2279.53 C7.1 C11.1 ; C11.1@1346.46,2350.6 C10.2 ; v1@1405.3,2393.49 v1(1405.3,2409.45) 1401.57,2409.45 1381.89,2389.76 1350.39,2389.76 C10.2
I2C_CLK: H13.3 U1.36 | length 1514.6
  Top Side w11.81: v1(807.09,1527.56) 897.69,1618.16 934.36,1618.16 1114.17,1797.98 v1(1114.17,1964.57) ; U1.36 1171.26,2103.93 1185.04,2090.15 1185.04,2023.62 v1(1192.91,2015.75)
  Bottom Side w11.81: H13.3 353.27,1397.64 376.32,1374.59 654.11,1374.59 v1(807.09,1527.56) ; v1(1114.17,1964.57) 1141.73,1964.57 v1(1192.91,2015.75)
I2C_DATA: H13.4 U1.43 | length 1467.6
  Top Side w11.81: H13.4 269.32,1497.64 451.6,1679.92 665.19,1679.92 680.15,1694.88 750,1694.88 771.65,1716.54 771.65,1754.89 928.18,1911.42 995.95,1911.42 1052.42,1967.89 1052.42,1985.49 v1(1114.17,2047.24) ; v1(1307.09,2062.99) 1307.09,2142.72 U1.43
  Bottom Side w11.81: v1(1114.17,2047.24) 1118.11,2051.18 1287.82,2051.18 1299.63,2062.99 v1(1307.09,2062.99)
LED_DIN: U1.3 U7.3 | length 2312.5
  Top Side w11.81: U7.3 v1(826.77,1429.13) ; v1(1330.71,2700.79) 1368.11,2663.39 U1.3
  Bottom Side w11.81: v1(826.77,1429.13) 826.77,1502.7 838.58,1514.51 838.58,2590.55 905.51,2657.48 905.51,2893.7 929.13,2917.32 1118.11,2917.32 1137.8,2897.64 1137.8,2799.21 1173.23,2763.78 1267.72,2763.78 v1(1330.71,2700.79)
LED_STRIP: H7.2 U7.4 | length 230.1
  Top Side w11.81: H7.2 687.01,1318.9 700.79,1332.68 U7.4
MOTORL1: H4.1 U6.2 | length 898.7
  Top Side w11.81: U6.2 1639.76,503.2 1641.73,501.24 1641.73,421.26 1665.86,397.13 1920.75,397.13 2065.92,251.97 2296.85,251.97 H4.1
MOTORL2: H4.2 U6.4 | length 798.9
  Top Side w11.81: U6.4 1690.95,432.12 1703.16,419.9 1923.04,419.9 1980.52,362.41 2291.13,362.41 H4.2
MOTORR1: H6.1 U6.7 | length 636.5
  Top Side w11.81: U6.7 1767.72,564.96 1785.43,547.24 2165.35,547.24 2169.29,551.18 2169.42,551.18 H6.1
MOTORR2: H6.2 U6.5 | length 661
  Top Side w11.81: U6.5 1716.54,564.96 1751.97,529.53 2247.77,529.53 H6.2
NetC1_2: C1.2 U1.62 Y1.1 | length 748
  Top Side w11.81: U1.62 1479.33,2472.44 1521.12,2472.44 1549.21,2500.54 1549.21,2535.92 1549.21,2568.9 1570.87,2590.55 1787.4,2590.55 1787.4,2619.3 1798.03,2629.92 1846.46,2629.92 1866.14,2649.61 1866.14,2682.06 1873.06,2688.98 1921.26,2688.98 C1.2 1952.76,2655.51 1977.29,2630.98 1977.29,2623.33 Y1.1
NetC2_2: C2.2 U1.61 Y1.3 | length 567.3
  Top Side w11.81: U1.61 1479.33,2452.76 1526.49,2452.76 1566.93,2493.2 1566.93,2540.35 1593.5,2566.93 1765.98,2566.93 Y1.3 1845.4,2494.33 1867.06,2472.67 1867.06,2443.97 C2.2 ; C2.2@1897.64,2429.13 C2.2@1897.64,2431.1
NetC4_1: C4.1 U2.1 | length 93
  Top Side w11.81: C4.1 839.03,925.65 U2.1
NetC4_2: C4.2 D1.2 L1.1 U2.8 | length 1428.3
  Top Side w11.81: U2.8 657.03,925.65 C4.2 720.47,507.87 L1.1 681.1,240.16 D1.2
NetC8_1: C8.1 C10.1 C12.1 C15.1 L2.2 U1.8 U1.12 U1.24 U1.54 | length 1512.5
  Top Side w11.81: U1.24 1071.89,2372.05 1149.61,2449.76 v1(1149.61,2503.94) v1@1155.92,2503.94 ; U1.12 1190.94,2538.96 v1@1155.92,2503.94 ; v1(1236.22,2354.33) 1244.09,2354.33 1303.14,2295.28 1334.65,2295.28 1342.52,2287.4 1362.2,2287.4 1370.08,2279.53 1426.15,2279.53 1426.15,2300.17 1437.99,2312.01 1476.38,2312.01 U1.54 ; L2.2 1283.46,2850.39 1269.68,2836.61 U1.8 1268.7,2578.74 1268.7,2536.42 1236.22,2503.94 v1@1155.92,2503.94
  Bottom Side w11.81: v1(1149.61,2503.94) 1143.7,2503.94 1110.24,2470.47 C12.1 C15.1 1200.79,2476.38 1255.91,2476.38 C8.1 C10.1 1275.59,2385.83 1244.1,2354.33 v1(1236.22,2354.33)
NetC13_2: C13.2 R6.2 U3.1 | length 813.7
  Top Side w11.81: U3.1 91.68,2551.29 49.21,2508.83 49.21,2420.3 72.38,2397.14 222.44,2397.14 230.99,2388.58 230.99,2343.81 265.75,2309.06 265.75,2271.65 297.24,2240.16 328.74,2240.16 356.3,2212.6 433.07,2212.6 460.63,2240.16 R6.2
NetC17_2: C17.2 C18.2 L2.1 U1.64 | length 964.1
  Top Side w11.81: C18.2 1385.83,3043.31 1425.2,3082.68 1481.27,3082.68 1490.26,3073.69 1490.26,2903.64 1468.5,2881.89 L2.1 1480.32,2838.58 v1(1480.32,2555.12) 1477.36,2552.17 U1.64
  Bottom Side w11.81: C17.2 1393.7,2543.31 1468.5,2543.31 v1(1480.32,2555.12)
NetC18_1: C18.1 R9.2 | length 88.2
  Top Side w11.81: C18.1 1452.76,2944.88 R9.2
NetC20_2: C20.2 R18.1 U4.5 | length 228.4
  Top Side w11.81: R18.1 458.66,2051.18 U4.5 519.69,2072.83 552.17,2105.31 552.17,2142.69 552.1,2142.76 552.1,2170.21 C20.2
NetC23_1: C23.1 C24.1 R16.1 R17.1 U6.12 | length 466.7
  Top Side w11.81: R17.1 1614.17,1007.87 R16.1 1622.05,893.7 1673.23,893.7 1688.98,877.95 1688.98,864.17 1716.54,836.61 U6.12 1716.54,785.43 1736.68,765.29 1805.58,765.29 C23.1
NetC24_2: C24.2 U6.11 | length 85.1
  Top Side w11.81: C24.2@1736.22,893.7 1736.22,858.27 1742.13,852.36 U6.11
NetC25_1: C25.1 U6.14 | length 197.7
  Top Side w11.81: C25.1 1622.05,716.54 1642.73,737.22 1642.73,750.97 1651.85,760.08 1656.24,760.08 1665.35,769.2 U6.14
NetDL1_1: DL1.1 R4.1 | length 76.4
  Top Side w11.81: R4.1 1751.97,1948.82 DL1.1
NetDL2_1: DL2.1 R5.1 | length 99.3
  Top Side w11.81: R5.1 1606.3,1952.76 DL2.1
NetF1_1: F1.1 H1.2 | length 359.3
  Top Side w11.81: H1.2 2066.93,1272.99 2082.05,1257.87 F1.1
NetF1_2: F1.2 Q1.3 | length 640.1
  Top Side w11.81: Q1.3 2145.71,1425.2 2198.86,1372.05 F1.2
NetR1_2: R1.2 U1.57 | length 790.5
  Top Side w11.81: U1.57 1506.93,2372.05 1528.58,2350.39 1606.3,2350.39 1618.11,2362.2 v1(1618.11,2433.07) ; v1(1515.75,2736.22) 1515.75,2915.35 1527.56,2927.17 R1.2
  Bottom Side w11.81: v1(1515.75,2736.22) 1604.33,2647.64 1604.33,2499.3 1618.11,2485.52 v1(1618.11,2433.07)
NetR2_2: R2.2 U1.56 | length 896.8
  Top Side w11.81: v1(1399.61,2330.71) 1405.51,2330.71 1427.17,2352.36 U1.56 ; v1(1566.93,2866.14) 1566.93,2891.73 1578.74,2903.54 R2.2
  Bottom Side w11.81: v1(1399.61,2330.71) 1480.32,2330.71 1535.43,2385.83 1535.43,2544.54 1472.44,2607.53 1472.44,2775.59 1519.68,2822.83 1553.15,2822.83 1559.06,2828.74 v1@1559.06,2866.14
NetR3_1: R3.1 U2.4 | length 154.3
  Top Side w11.81: U2.4 859.07,1078.94 863.16,1083.03 863.16,1111.19 881.89,1129.92 909.45,1129.92 921.26,1118.11 R3.1
NetTP2_1: TP2.1 U1.55 | length 267.8
  Top Side w11.81: U1.55 1714.57,2332.68 TP2.1
nFAULT: U1.32 U6.8 | length 2291.5
  Top Side w11.81: v1(976.38,2169.29) 1009.37,2202.28 1030.04,2202.28 U1.32 ; U6.8 v1(1858.27,590.55)
  Bottom Side w11.81: v1(976.38,2169.29) 976.38,2103.8 1078.74,2001.43 1078.74,1627.22 1303.15,1402.81 1303.15,1332.58 1288.83,1318.26 1288.83,842.52 1540.8,590.55 v1(1858.27,590.55)
nRST: H2.1 nRST_TP.1 S1.1 U1.39 | length 2381
  Top Side w11.81: v1(1110.24,1720.47) 1110.24,1714.82 1086.61,1691.2 1086.61,1456.69 1082.68,1452.76 nRST_TP.1 1082.68,1179.13 S1.1 ; v1(1228.35,1956.69) 1240.16,1968.5 1240.16,2094.49 1230.32,2104.33 U1.39 1230.32,2174.25 1260.79,2204.72 1437.95,2204.72 1444.84,2197.83 1512.26,2197.83 1525.05,2185.04 1740.16,2185.04 1765.08,2160.12 1792.26,2160.12 1818.52,2133.86 v1(1818.9,2133.86)
  Bottom Side w11.81: v1(1110.24,1720.47) 1188.98,1799.21 1188.98,1917.32 v1(1228.35,1956.69) ; v1(1818.9,2133.86) 1823.85,2138.81 1833.63,2138.81 1842.52,2129.92 2031.5,2129.92 2090.57,2070.84 2284.06,2070.84 H2.1
nSLEEP: U1.41 U6.1 | length 1879.8
  Top Side w11.81: v1(1267.72,1393.7) 1267.72,1969.74 1257.87,1979.58 1257.87,2083.38 1269.68,2095.19 U1.41 ; v1(1602.36,503.94) 1606.3,507.87 1606.3,541.34 1614.17,549.21 U6.1
  Bottom Side w11.81: v1(1267.72,1393.7) 1267.72,838.58 v1(1602.36,503.94)
Proximity_Signal: H13.7 U1.23 | length 1322.3
  Top Side w11.81: v1(807.09,2366.14) 808.8,2366.14 834.39,2391.73 U1.23
  Bottom Side w11.81: H13.7 283.46,1892.13 283.46,1973.4 290.38,1980.31 720.47,1980.31 807.09,2066.93 v1(807.09,2366.14)
RADIO_CSN: U1.28 U3.4 | length 980.4
  Top Side w11.81: U3.4 241.84,2580.99 297.24,2525.59 408.91,2525.59 639.23,2295.28 1040.35,2295.28 U1.28
RADIO_ENABLE: U1.15 U3.3 | length 1095.7
  Top Side w11.81: U3.3 191.79,2687.85 206.69,2702.76 903.54,2702.76 1058.11,2548.19 1094.49,2548.19 1105.27,2537.4 1119.14,2537.4 1131.89,2550.16 U1.15
RADIO_IRQ: U1.20 U3.8 | length 679.3
  Top Side w11.81: U3.8 544.96,2538.84 768.24,2538.84 856.3,2450.79 U1.20
RADIO_MISO: U1.27 U3.7 | length 893.8
  Top Side w11.81: U3.7 392.01,2608.16 421.43,2578.74 430.93,2578.74 501.79,2507.87 712.6,2507.87 v1(740.16,2480.31) ; v1(740.16,2330.71) 757.87,2312.99 U1.27
  Bottom Side w11.81: v1(740.16,2330.71) v1(740.16,2480.31)
RADIO_MOSI: U1.22 U3.6 | length 902
  Top Side w11.81: U3.6 341.96,2568.05 348.99,2561.02 423.59,2561.02 508.24,2476.38 v1(677.17,2476.38) ; v1(677.17,2393.7) 740.16,2393.7 755.91,2409.45 1040.35,2409.45 U1.22
  Bottom Side w11.81: v1(677.17,2393.7) v1(677.17,2476.38)
RADIO_SCK: U1.21 U3.5 | length 901.1
  Top Side w11.81: U3.5 291.9,2582.68 331.27,2543.31 416.25,2543.31 526.76,2432.8 1040.62,2432.8 U1.21 ; U3.5@291.9,2673.23 291.9,2657.48 U3.5@301.18,2666.76
Servo1: H13.5 U1.38 | length 1578.7
  Top Side w11.81: H13.5 144.67,1641.95 144.67,1735.22 153.54,1744.09 240.16,1744.09 248.03,1736.22 702.87,1736.22 913.5,1946.85 981.27,1946.85 1016.99,1982.57 1016.99,2123.78 1119.59,2226.38 1180.57,2226.38 1210.63,2196.31 U1.38
Servo2: H13.6 U1.37 | length 1350
  Top Side w11.81: H13.6 458.88,1697.64 473.84,1712.6 704.3,1712.6 920.84,1929.13 988.61,1929.13 1034.71,1975.23 1034.71,2093.76 1086.61,2145.67 1086.61,2168.35 1126.93,2208.66 1173.23,2208.66 1190.94,2190.94 U1.37
STATUS0: R4.2 U1.48 | length 402.2
  Top Side w11.81: U1.48 1407.48,2133.32 1426.63,2114.17 1645.67,2114.17 R4.2
STATUS1: R5.2 U1.47 | length 275.1
  Top Side w11.81: U1.47 1387.8,2115.12 1406.46,2096.46 1505.91,2096.46 R5.2
SWCLK: H2.2 U1.53 | length 959.4
  Top Side w11.81: U1.53 1612.2,2293.31 v1(1614.17,2295.28)
  Bottom Side w11.81: v1(1614.17,2295.28) 1877.95,2295.28 1913.39,2259.84 2248.03,2259.84 2272.64,2235.24 2272.64,2159.43 H2.2
SWDIO: H2.4 U1.51 | length 768.7
  Top Side w11.81: U1.51 1479.33,2255.91 1578.74,2255.91 1588.58,2246.06 1641.99,2246.06 1667.58,2220.47 v1(1669.29,2220.47)
  Bottom Side w11.81: v1(1669.29,2220.47) 1671.96,2217.8 2225.68,2217.8 H2.4
USB_DETECT: R7.1 R8.2 U1.35 USB_DETECT_TP.1 | length 2354.1
  Top Side w11.81: U1.35 1151.57,2049.09 1153.54,2047.12 1153.54,1975.14 1151.57,1973.17 1151.57,1968.5 ; v1(1224.41,1885.83) 1224.41,1895.67 1151.57,1968.5 ; USB_DETECT_TP.1 1236.22,1358.27 1151.57,1442.91 1151.57,1968.5 ; v1(1622.05,2866.14) 1622.05,2870.08 1647.64,2895.67 R8.2 1677.17,2937.01 1692.91,2952.76 R7.1